# Altium PCB MC60_PCB_V1.PcbDoc
Units mm, origin at the board's own origin, x right, y up, seen from the top; angles counter-clockwise.
Board outline 45 x 60 mm, 2 copper layers (Top Layer, Bottom Layer), stack 1.569 mm thick; 42 components, 31 nets, 163 pads, 129 vias.
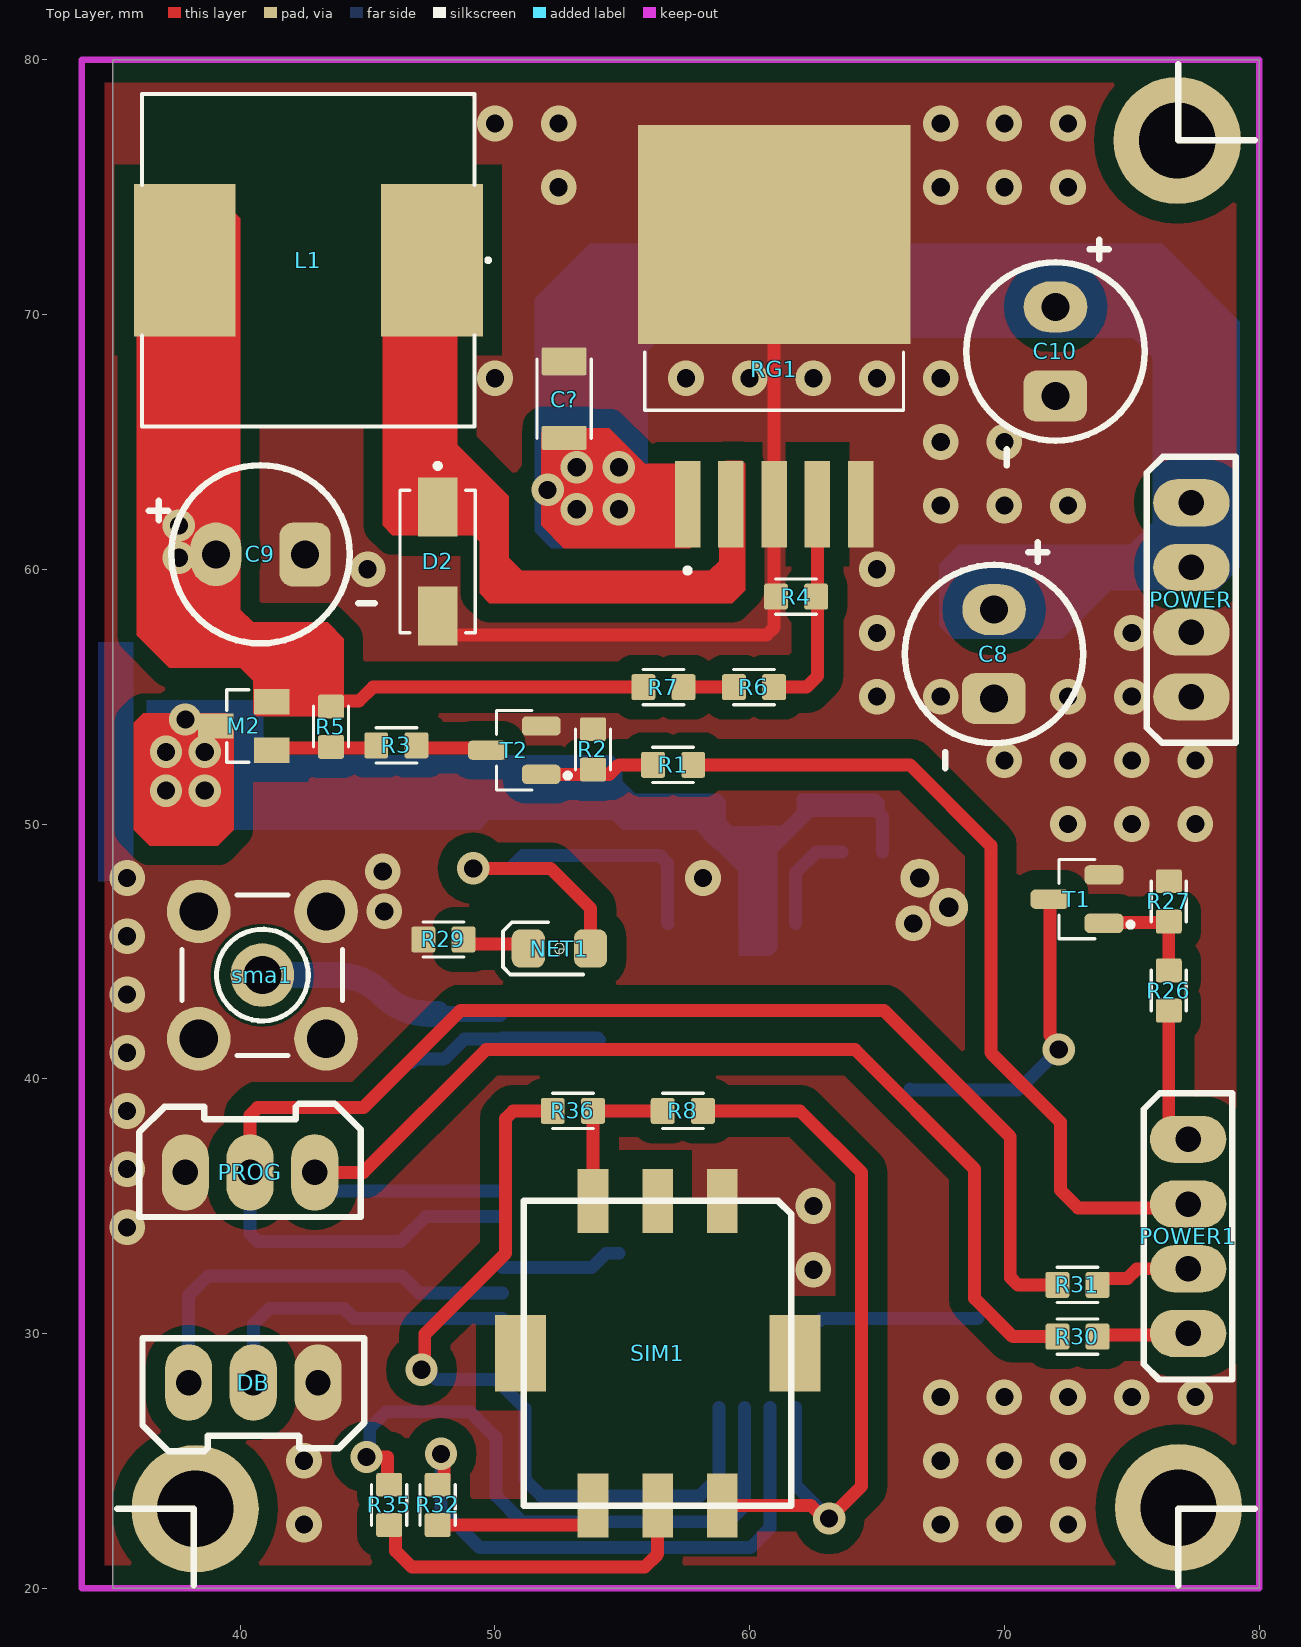
[diagram p0: Top Layer view]
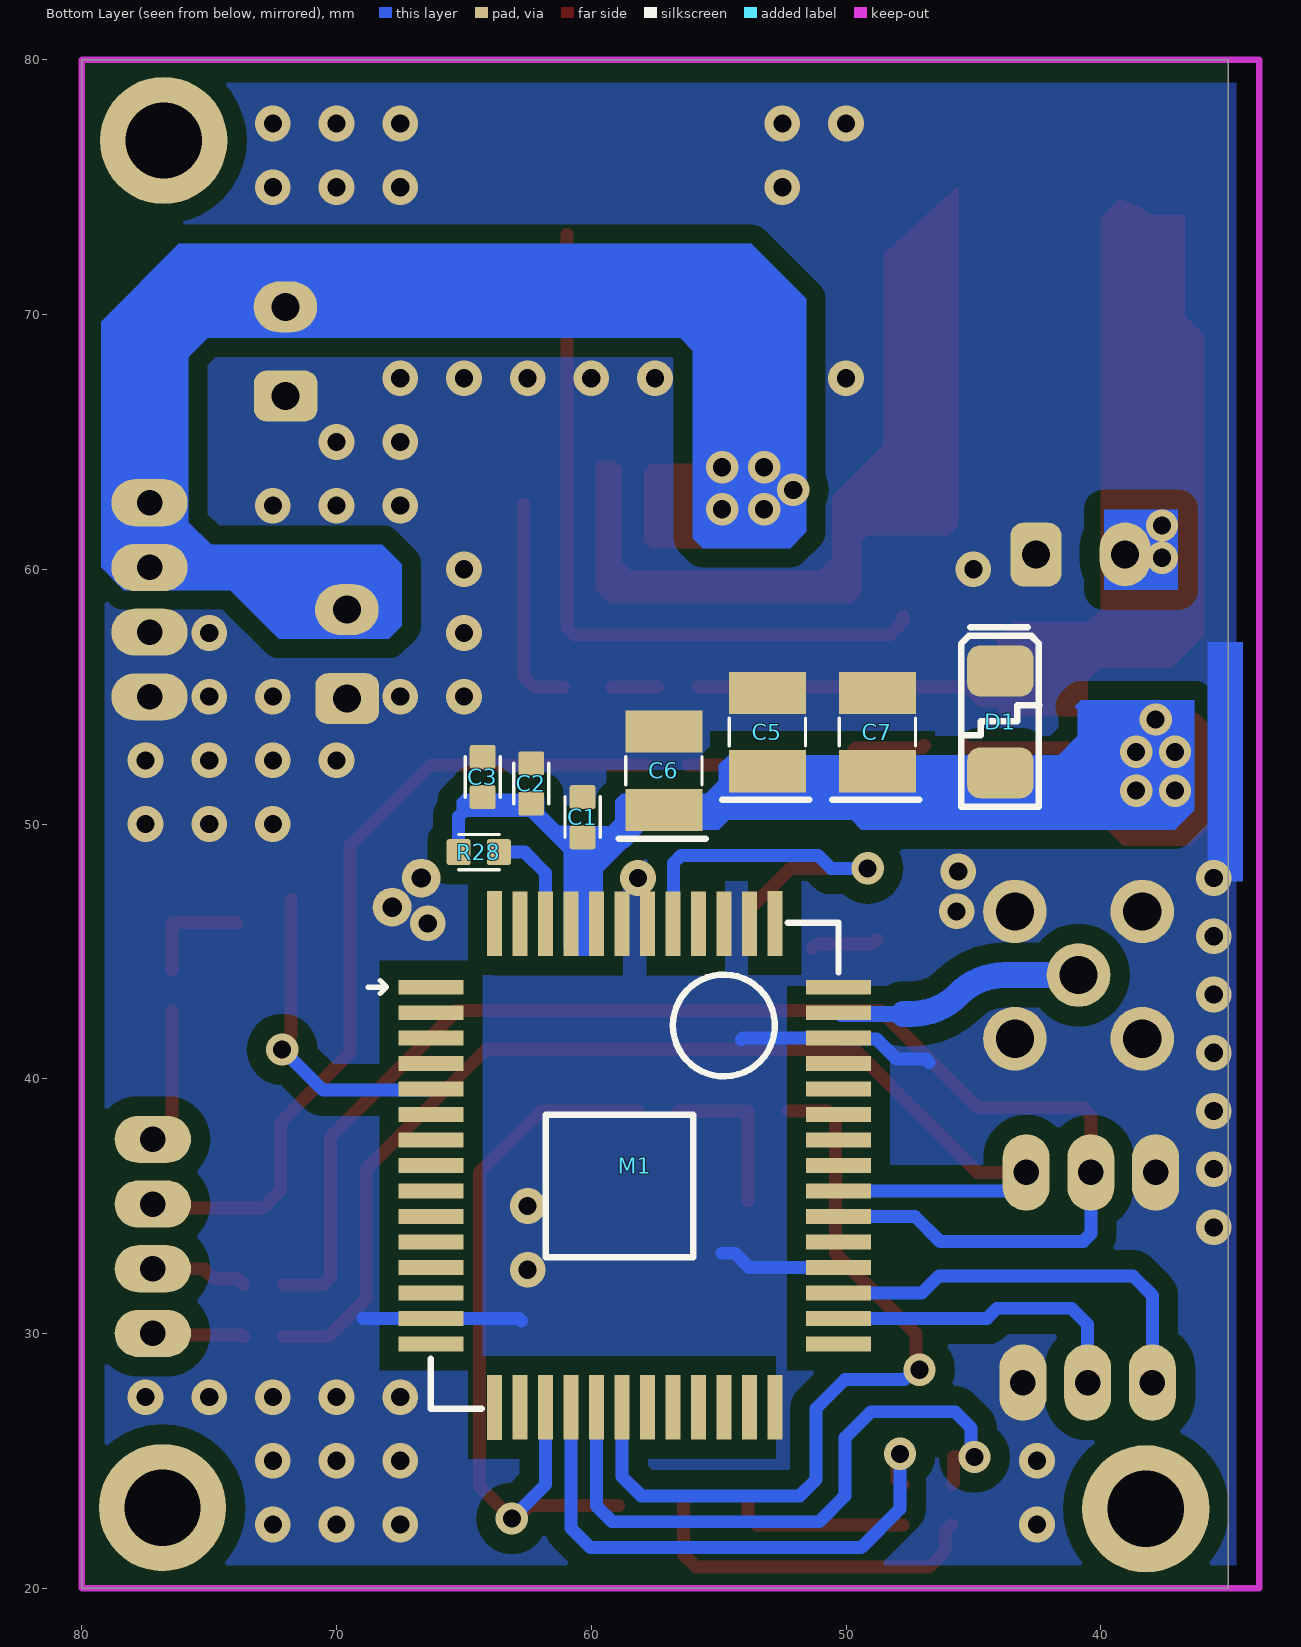
[diagram p1: Bottom Layer view, seen from below]
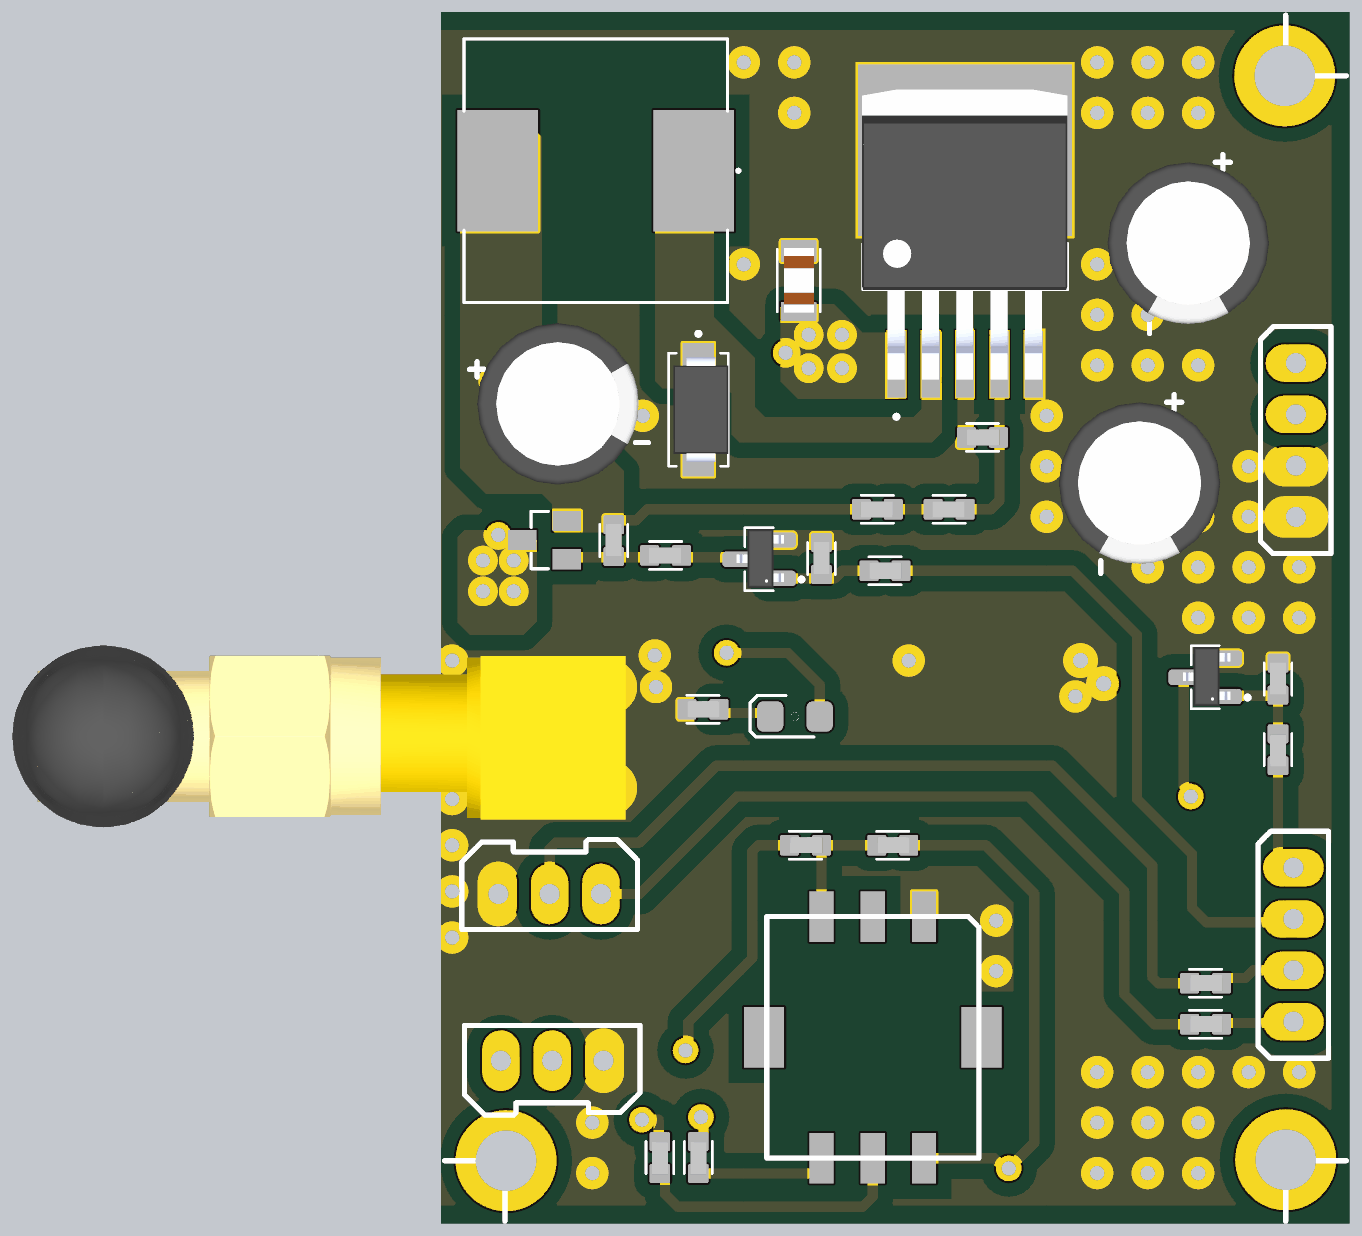
[diagram p2: 3D render of the assembled board from above, using the file's embedded part models]
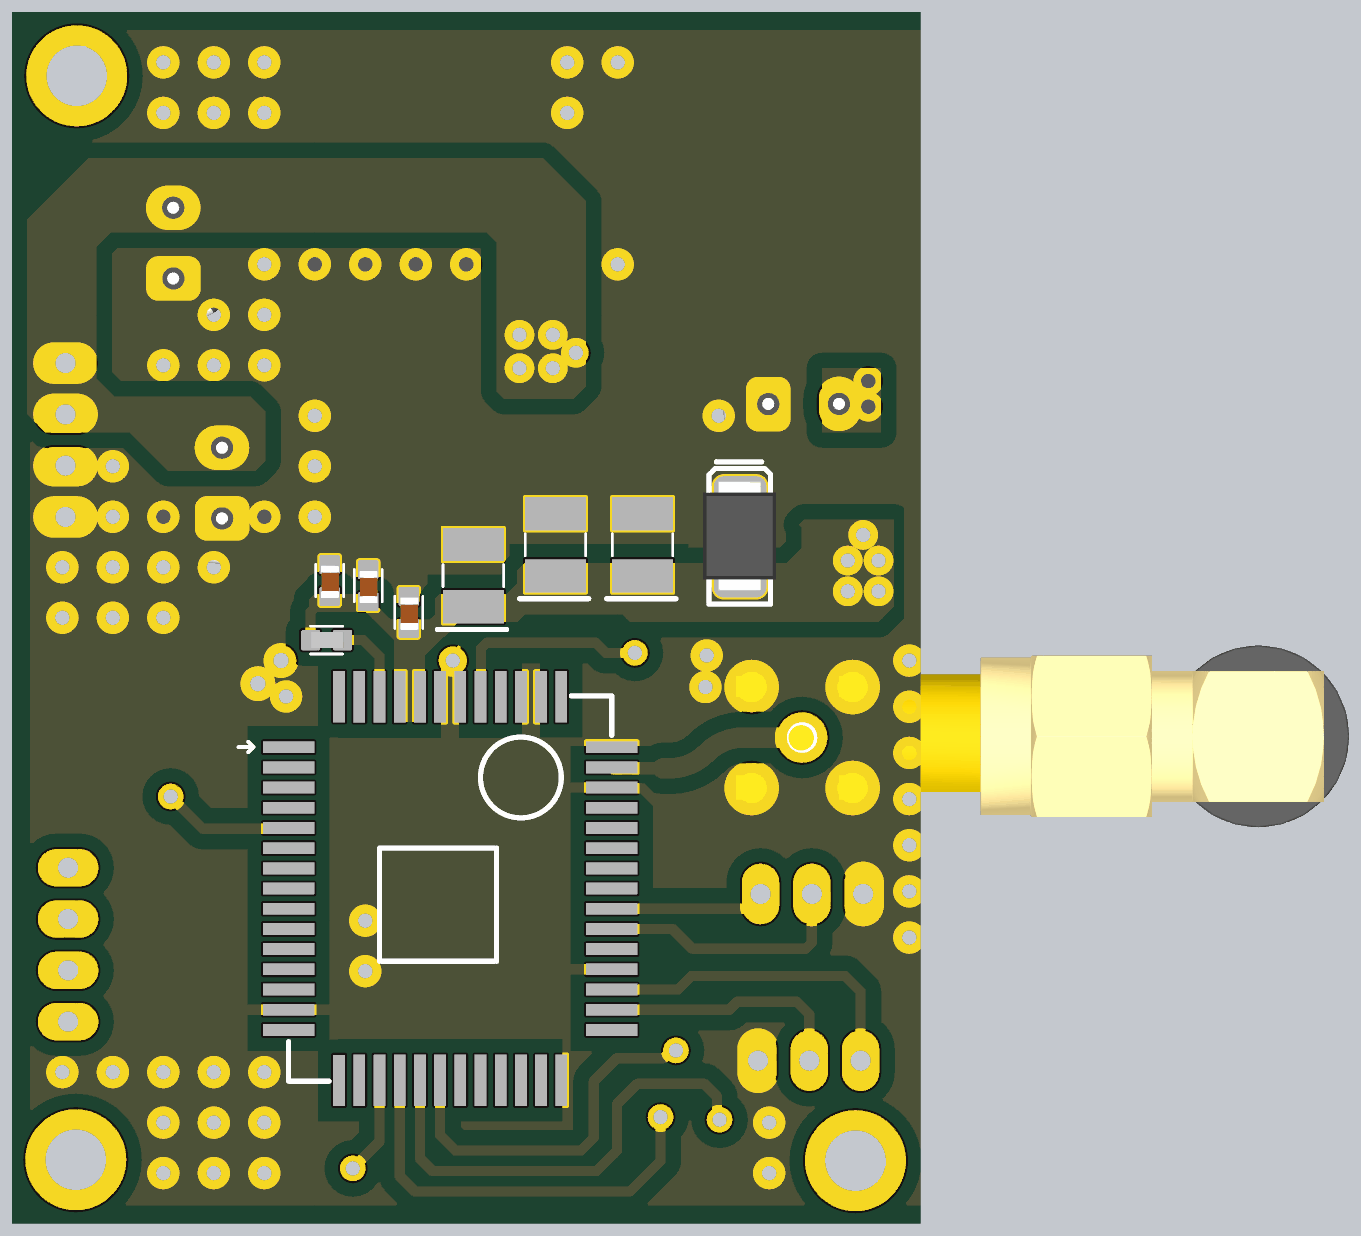
[diagram p3: 3D render of the assembled board from below, using the file's embedded part models]

## Layer stack, top to bottom
Top Solder: solder mask 0.0254, SM-001, Dk 4
Top Layer: signal copper 0.035
Dielectric 1: core 1.4986, Core-043, Dk 4.3
Bottom Layer: signal copper 0.035
Bottom Solder: solder mask 0.0254, SM-001, Dk 4

## Board outline
35,20 35,80 80,80 80,20

## Design rules (kind name [scope] priority, off if disabled: settings)
Clearance Clearance_1 [InPolygon] p1: gap=0.762 ignorepadtopadclearanceinfootprint=FALSE
Clearance [All] p2: gap=0.178 ignorepadtopadclearanceinfootprint=FALSE
Height [All] p1: minheight=0 maxheight=254 prefheight=12.7
PolygonConnect [All] p1: connectstyle=Direct reliefconductorwidth=0.254 reliefentries=4 polygonreliefangle="90 Angle" airgapwidth=0.254
RoutingVias [All] p1: holewidth=0.711 width=1.27 viastyle="Through Hole" minholewidth=0.711 minwidth=1.27 maxholewidth=0.711 maxwidth=1.27
SolderMaskExpansion [All] p1: expansion=0.102 istentingtop=FALSE
Width [All] p1: maxlimit=5 minlimit=0.254 preferedwidth=0.254 minimp=50.000000 maximp=50.000000 favimp=50.000000
29 further rules are at their usual default settings.

## Components (designator, comment, footprint, x,y, rotation, side; value= is the part's Value field where it differs from the comment)
C1 "10uF" CAP-0603 60.325,50.165 r270 bottom
C2 "1uF" CAP-0603 62.34,51.487 r270 bottom
C3 "100nF" CAP-0603 64.245,51.741 r270 bottom
C5 "100UF-16V B" CAP_TANTAL_B 53.086,53.61 r90 bottom
C6 "100UF-16V B" CAP_TANTAL_B 57.15,52.086 r90 bottom
C7 "100UF-16V B" CAP_TANTAL_B 48.768,53.61 r90 bottom
C8 "100uF/35v" CAP-EL-P3.5MM 69.596,54.92 r90 top
C9 "1000uF/10v" CAP-EL-P3.5MM 42.545,60.589 r180 top
C10 "100uF/35v" CAP-EL-P3.5MM 72.009,66.802 r90 top
C? "10uF" CAP-1206 52.578,66.675 r270 top
D1 "5V" TVS-5V-SMD 43.942,52.007 r90 bottom
D2 "ss34" DIOD/1N4007/SMD 47.752,62.465 r270 top
DB "XH3" XH3 43.029,28.043 r180 top
L1 "100uH" 100UH-101M 42.672,72.136 r180 top
M1 "mc60" MC60 66.294,43.591 r0 bottom
M2 "AO340" AO3401A 40.259,53.975 r90 top
NET1 "G" LED/0805 51.308,45.112 r0 top
POWER "" CONECTOR/XH/4PIN 77.343,54.991 r90 top
POWER1 "" CONECTOR/XH/4PIN 77.216,30 r90 top
PROG "XH3" XH3 37.87,36.346 r0 top
R1 "100R" RES/0603 56.896,52.324 r180 top
R2 "100K" RES/0603 53.848,52.832 r270 top
R3 "100R" RES/0603 46.228,53.086 r0 top
R4 "1K" RES/0603 61.722,58.928 r180 top
R5 "100K" RES/0603 43.561,53.721 r270 top
R6 "2.2K" RES/0603 60.269,55.372 r0 top
R7 "220R" RES/0603 56.713,55.372 r0 top
R8 "10K" RES/0603 57.277,38.735 r180 top
R26 "100R" RES/0603 76.454,43.561 r90 top
R27 "10K" RES/0603 76.454,46.863 r270 top
R28 "1K" RES/0603 64.516,48.895 r0 bottom
R29 "1.5K" RES/0603 47.879,45.466 r180 top
R30 "10R" RES/0603 72.771,29.873 r180 top
R31 "10R" RES/0603 72.771,31.905 r180 top
R32 "22R" RES/0603 47.752,23.368 r90 top
R35 "22R" RES/0603 45.847,23.368 r90 top
R36 "22R" RES/0603 52.959,38.735 r180 top
RG1 "lm2576" lm2576 62.103,68.834 r90 top
SIM1 "sim_card_nano" sim_card_nano 56.388,23.241 r0 top
sma1 "SMA" SMA 40.894,44.069 r180 top
T1 "7002" SOT23 73.914,46.101 r0 top
T2 "7002" SOT23 51.822,51.948 r0 top

## Footprints (in the part's own frame and the unit in brackets; to place one, negate y for a bottom-side part, rotate by r counter-clockwise, add the part's x,y. Pads: shape width x height; smd on the part's side, far side on the other; paste and mask are expansions set on the pad)
100UH-101M [mm]
  rect 4x6 smd: 1(-4.851,0) 2(4.851,0)
  silkscreen extent -7.14,-6.53 6.53,6.53
AO3401A [mm]
  rect 1x1.4 smd: D(-0.127,1.227) G(-1.077,-0.973) S(0.823,-0.973)
  silkscreen extent -1.55,-0.06 1.3,0.79
CAP-0603 [mm]
  rrect20% 0.94x1.02 smd: 1(-0.893,-0.017) 2(0.687,-0.017)
  silkscreen extent -0.9,-0.71 0.7,0.67, body extent -0.84,-0.44 0.76,0.46, height 0.77
CAP-1206 [mm]
  rrect14% 1.09x1.77 smd: 1(-1.488,0.139)
  rrect14% 0.94x1.77 smd: 2(1.517,0.139)
  silkscreen extent -1.57,-0.93 1.53,1.2, body extent -1.63,-0.6 1.57,0.9, height 1.6
CAP-EL-P3.5MM [mm]
  oval 2x2.5 hole 1.1: +(3.5,0)
  rrect50% 2x2.5 hole 1.1: -(0,0.01)
  silkscreen extent -2.73,-3.5 6.13,3.5, body extent -2.25,-4 5.75,4, height 11.5
CAP_TANTAL_B [mm]
  rect 1.651x3.02 smd: +(-1.54,0) -(1.54,0)
  silkscreen extent -2.67,-1.65 0.55,1.78
CONECTOR/XH/4PIN [mm]
  oval 1.85x3 hole 1: 1(0,0) 2(2.54,0) 3(5.08,0) 4(7.62,0)
  silkscreen extent -1.81,-1.73 9.43,1.75
DIOD/1N4007/SMD [mm]
  rect 2.33x1.56 smd: A(4.299,0) K(0.019,0)
  silkscreen extent -1.7,-1.48 4.96,1.48, body extent -0.44,-1.24 4.76,1.49, height 2.6
LED/0805 [mm]
  rrect50% 1.3x1.5 smd: A(2.45,0) K(0,0)
  silkscreen extent -0.99,-1.02 2.16,1.03
lm2576 [mm]
  rect 3.4x1 smd paste-3 mask+0: 1(-6.282,4.543) 2(-6.282,2.843) 3(-6.282,1.143) 4(-6.282,-0.557) 5(-6.282,-2.257)
  rect 8.6x10.7 smd paste-6 mask+0: 6(4.318,1.143)
  silkscreen extent -8.98,-3.94 -0.3,6.22, body extent -7.04,-3.92 7.31,6.24, height 4.65
MC60 [mm]
  rect 2.54x0.584 smd: 1(0,0) 2(0,1) 3(0,2) 4(0,3) 5(0,4) 6(0,5) 7(0,6) 8(0,7) 9(0,8) 10(0,9) 11(0,10) 12(0,11) 13(0,12) 14(0,13) 15(0,14) 28(-16,14) 29(-16,13) 30(-16,12) 31(-16,11) 32(-16,10) 33(-16,9) 34(-16,8) 35(-16,7) 36(-16,6) 37(-16,5) 38(-16,4) 39(-16,3) 40(-16,2) 41(-16,1) 42(-16,0)
  rect 0.584x2.54 smd: 16(-2.5,16.5) 17(-3.5,16.492) 18(-4.5,16.492) 19(-5.5,16.492) 20(-6.5,16.492) 21(-7.5,16.492) 22(-8.5,16.492) 23(-9.5,16.492) 24(-10.5,16.492) 25(-11.5,16.492) 26(-12.5,16.492) 27(-13.5,16.492) 43(-13.5,-2.5) 44(-12.5,-2.492) 45(-11.5,-2.492) 46(-10.5,-2.492) 47(-9.5,-2.492) 48(-8.5,-2.492) 49(-7.5,-2.492) 50(-6.5,-2.492) 51(-5.5,-2.492) 52(-4.5,-2.492) 53(-3.5,-2.492) 54(-2.5,-2.5)
  silkscreen extent -16,-2.54 2.48,16.54
RES/0603 [mm]
  rrect20% 0.94x1.02 smd: 1(-0.889,0) 2(0.691,0)
  silkscreen extent -0.9,-0.69 0.7,0.69, body extent -0.93,-0.41 0.67,0.39, height 0.43
sim_card_nano [mm]
  rect 1.2x2.5 smd: 1(2.54,0) 2(0,0) 3(-2.54,0) 5(2.54,11.96) 6(0,11.96) 7(-2.54,11.96)
  rect 2x3 smd: 4(-5.385,5.98) 4(5.385,5.98)
  silkscreen extent -5.25,0 5.25,11.96
SMA [mm]
  round 2.5 hole 1.5: 1(0.025,0) GND(-2.475,2.5) GND(-2.475,-2.5) GND(2.525,2.5) GND(2.525,-2.5)
  silkscreen extent -3.12,-3.15 3.18,3.15, body extent -3.25,-4.56 27.11,4.44, height 49.75
SOT23 [mil]
  rrect50% 60x30 smd: 1(-0.24,0) 2(-83.7,37.4) 3(-0.24,74.8)
  silkscreen extent -70,-24 45,99, body extent -86,-19 7,96, height 44
TVS-5V-SMD [mm]
  rrect50% 2x2.6 smd: 1(4,0) 2(0,0)
  silkscreen extent -1.33,-1.53 5.72,1.54, body extent -0.66,-1.79 4.74,1.83, height 2.43
XH3 [mm]
  oval 1.85x3 hole 1: 1(-0.024,-0.024) 2(2.516,-0.024) 3(5.056,-0.024)
  silkscreen extent -1.83,-1.78 6.87,2.67

## Part data
C1 C2 C3 C?: library part cap_smd
C5 C6 C7 C8 C9 C10: library part cap-electrolit
D1: library part TVS-SMD
D2: library part DIOD/RECTIFIERS
L1: library part inductor
M2: library part MOSFET_P_CH
NET1: library part LED
POWER POWER1: library part CONECTOR/XH/4PIN
R1 R2 R3 R4 R5 R6 R7 R8 R26 R27 R28 R29 R30 R31 R32 R35 R36: library part RES/SMD
T1 T2: library part NPN

## Free pads (board coordinates)
  round 5 hole 3: 11(38.227,23.114) 11(76.787,76.835) 11(76.835,23.162)
  round 1.524 hole 0.762: 13(66.675,47.879) 13(67.818,46.736)

## Via types
v1: diameter 1.4, hole 0.711, Top Layer to Bottom Layer, 111 vias
v2: diameter 1.27, hole 0.711, Top Layer to Bottom Layer, 18 vias

## Nets (pads, with @x,y where several pads share a name; then routed paths per layer and width w, separated by ;. In a path a pad name is that pad's centre, name@x,y a point inside that pad or via, vN(x,y) a via of type N, cw(c..) or ccw(c..) an arc to the next point about the centre after c; other vN are vias at no path point)
4V3: C1.2 C2.2 C3.2 C5.+ C6.+ C7.+ D1.2 M1.50 M1.51 M2.D R28.2 | length 39.1
  Top Layer w0.508: v2(38.608,51.308) 38.754,51.454 38.754,53.602 39,53.848 M2.D
  Bottom Layer w0.508: v2(38.608,51.308) 38.814,51.308 39.513,52.007 D1.2 48.768,52.007 C5.+@52.641,52.007 ; C5.+ 53.657,51.498 54.546,51.498 55.176,50.869 56.827,50.869 C6.+ 57.834,50.546 58.406,49.974 58.406,49.574 58.689,49.29 C1.2@60.114,49.29 ; M1.50 59.794,48.97 C1.2@60.114,49.29 ; C1.2@60.598,49.222 60.794,49.026 M1.51 ; C2.2@62.101,50.584 62.101,50.417 61.378,49.694 60.558,49.694 60.154,49.29 C1.2@60.114,49.29 ; C2.2 64.699,50.8 65.207,50.292 R28.2
  other v2: 37.084,51.308 37.084,52.832 38.608,52.832 37.846,54.102
+24: C8.+ C10.+ C?.2 POWER.3 POWER.4 RG1.1 | length 59.3
  Top Layer w0.762: C?.2 53.027,65.158 53.116,65.069 53.116,62.2 v2@53.213,62.103 ; 53.213,61.684 57.441,61.684 RG1.1@57.441,62.552
  Bottom Layer w0.762: v2@53.213,62.103 53.086,62.23 53.086,69.856 53.532,70.302 C10.+ 76.129,70.302 77.343,69.088 POWER.4 POWER.3 70.296,60.071 69.85,59.625 69.85,58.674 C8.+
  other v2: 53.213,62.357 54.864,62.357 52.07,63.119 53.213,64.008 54.864,64.008
GND: C1.1 C2.1 C3.1 C5.- C6.- C7.- C8.- C9.- C10.- C?.1 D1.1 D2.A DB.1 M1.14 M1.27 M1.31 M1.40 M1.42 M1.44 M1.45 M1.48 M1.49 pad.13 POWER.1 POWER.2 PROG.1 R2.1 R4.2 R27.1 R29.2 RG1.3 RG1.5 RG1.6 SIM1.5 sma1.GND T1.3 T2.3 | length 48.1
  Top Layer w0.508: D2.A 47.752,57.946 48.278,57.42 60.662,57.42 60.96,57.718 RG1.3 RG1.6
  Bottom Layer w0.508: 46.736,40.64 46.863,40.767 48.006,40.767 48.792,41.553 50.256,41.553 M1.40 54.04,41.591 54.102,41.529 ; M1.31 53.8,32.591 54.356,33.147 54.864,33.147 ; 62.738,30.48 62.849,30.591 M1.14 68.945,30.591 68.961,30.607
  other v1: 42.5,22.5 42.5,22.5 67.5,22.5 67.5,22.5 70,22.5 70,22.5 72.5,22.5 72.5,22.5 42.5,25 42.5,25 67.5,25 67.5,25 70,25 70,25 72.5,25 72.5,25 67.5,27.5 67.5,27.5 70,27.5 70,27.5 72.5,27.5 72.5,27.5 75,27.5 75,27.5 77.5,27.5 77.5,27.5 62.5,32.5 62.5,32.5 35.56,34.163 62.5,35 62.5,35 35.56,36.449 35.56,38.735 35.56,41.021 35.56,43.307 35.56,45.593 66.421,46.101 45.655,46.569 35.56,47.879 58.166,47.879 45.593,48.133 72.5,50 72.5,50 75,50 75,50 77.5,50 77.5,50 70,52.5 70,52.5 72.5,52.5 72.5,52.5 75,52.5 75,52.5 77.5,52.5 77.5,52.5 65,55 65,55 67.5,55 67.5,55 72.5,55 72.5,55 75,55 75,55 65,57.5 65,57.5 75,57.5 75,57.5 45,60 45,60 65,60 65,60 67.5,62.5 67.5,62.5 70,62.5 70,62.5 72.5,62.5 72.5,62.5 67.5,65 67.5,65 70,65 70,65 50,67.5 50,67.5 57.5,67.5 57.5,67.5 60,67.5 60,67.5 62.5,67.5 62.5,67.5 65,67.5 65,67.5 67.5,67.5 67.5,67.5 52.5,75 52.5,75 67.5,75 67.5,75 70,75 70,75 72.5,75 72.5,75 50,77.5 50,77.5 52.5,77.5 52.5,77.5 67.5,77.5 67.5,77.5 70,77.5 70,77.5 72.5,77.5 72.5,77.5
GSM_EN: POWER1.3 R1.1 | length 33
  Top Layer w0.508: R1.1 66.294,52.324 69.469,49.149 69.469,41.021 72.2,38.291 72.2,35.623 72.898,34.925 77.061,34.925 POWER1.3
NetC9_+: C9.+ L1.2 M2.S R5.1 R7.1 | length 33.7
  Top Layer w0.508: R5.1 43.777,54.826 44.666,54.826 45.212,55.372 R7.1
  Top Layer w0.762: L1.2 39.045,70.912 39.045,58.237 41.232,56.05 M2.S 43.333,54.798 43.521,54.61 R5.1
  other v2: 37.592,60.452 37.592,61.722
NetD2_K: D2.K L1.1 RG1.2 | length 26.9
  Top Layer w0.762: L1.1 47.752,71.907 D2.K 48.095,62.103 49.592,62.103 50.038,61.657 50.038,59.628 50.484,59.182 58.814,59.182 59.26,59.628 RG1.2
NetDB_2: DB.2 M1.29 | length 12.5
  Bottom Layer w0.508: DB.2 40.513,30.353 41.148,30.988 44.069,30.988 44.466,30.591 M1.29
NetDB_3: DB.3 M1.30 | length 16.3
  Bottom Layer w0.508: DB.3 37.973,31.496 38.735,32.258 46.355,32.258 47.022,31.591 M1.30
NetM1_5: M1.5 T1.2 | length 12.6
  Top Layer w0.508: T1.2 71.788,41.702 72.136,41.354 v2(72.136,41.148)
  Bottom Layer w0.508: M1.5 66.332,39.553 70.541,39.553 v2(72.136,41.148)
NetM1_19: M1.19 R32.2 | length 21.8
  Top Layer w0.508: R32.2 47.792,24.059 48.008,24.275 v2@48.008,24.942
  Bottom Layer w0.508: v2(47.879,25.273) 47.879,23.114 49.403,21.59 60.032,21.59 60.794,22.352 M1.19
NetM1_20: M1.20 R35.2 | length 25.4
  Top Layer w0.508: v2(44.958,25.146) 45.783,25.146 45.783,24.123 R35.2
  Bottom Layer w0.508: v2(44.958,25.146) 45.085,25.273 45.085,26.289 45.72,26.924 49.022,26.924 50.038,25.908 50.038,23.622 51.054,22.606 59.182,22.606 59.794,23.218 M1.20
NetM1_21: M1.21 R36.2 | length 31.6
  Top Layer w0.508: v2(47.117,28.575) 47.244,28.702 47.244,29.972 50.419,33.147 50.419,38.437 50.717,38.735 R36.2
  Bottom Layer w0.508: v2(47.117,28.575) 47.323,28.575 47.704,28.194 50.038,28.194 51.181,27.051 51.181,24.257 51.816,23.622 58.039,23.622 58.794,24.377 M1.21
NetM1_33: M1.33 PROG.2 R31.2 | length 56.2
  Top Layer w0.508: PROG.2 40.386,38.564 40.684,38.862 44.831,38.862 48.641,42.672 65.278,42.672 70.231,37.719 70.231,32.203 70.529,31.905 R31.2
  Bottom Layer w0.508: PROG.2 40.386,33.913 40.684,33.615 46.315,33.615 47.291,34.591 M1.33
NetM1_34: M1.34 PROG.3 R30.2 | length 46.5
  Top Layer w0.508: PROG.3 44.831,36.322 49.657,41.148 64.135,41.148 68.834,36.449 68.834,31.369 70.33,29.873 R30.2
  Bottom Layer w0.508: PROG.3 42.926,36.211 43.546,35.591 M1.34
NetM1_41: M1.41 sma1.1 | length 9.9
  Bottom Layer w0.508: M1.41@50.183,42.545 ccw(c50.183,42.702) M1.41
  Bottom Layer w0.635: 47.752,42.545 M1.41@50.183,42.545
  Bottom Layer w1.016: sma1.1 43.779,44.069 cw(c43.779,41.529) 45.575,43.325 45.611,43.289 ccw(c47.407,45.085) 47.407,42.545 47.752,42.545
NetM1_47: M1.47 NET1.A | length 17.2
  Top Layer w0.508: v2(49.149,48.26) 52.179,48.26 53.758,46.681 NET1.A
  Bottom Layer w0.508: v2(49.149,48.26) 50.59,48.26 51.098,48.768 56.471,48.768 56.769,48.47 56.769,46.108 M1.47
NetM1_52: M1.52 R28.1 | length 4.2
  Bottom Layer w0.508: M1.52 61.794,48.078 62.611,48.895 R28.1
NetM2_G: M2.G R3.1 R5.2 | length 4.2
  Top Layer w0.508: M2.G 41.326,52.992 45.245,52.992 R3.1
NetNET1_K: NET1.K R29.1 | length 2.7
  Top Layer w0.508: R29.1 48.945,45.289 51.131,45.289 NET1.K
NetPOWER1_1: POWER1.1 R30.1 | length 3.6
  Top Layer w0.508: R30.1 73.724,29.937 77.153,29.937 POWER1.1
NetPOWER1_2: POWER1.2 R31.1 | length 3.8
  Top Layer w0.508: R31.1 73.66,31.945 73.876,32.161 74.833,32.161 75.212,32.54 POWER1.2
NetR1_2: R1.2 R2.2 T2.1 | length 4.5
  Top Layer w0.508: T2.1 54.488,51.948 54.864,52.324 R1.2
NetR3_2: R3.2 T2.2 | length 2.9
  Top Layer w0.508: R3.2 47.013,52.992 49.602,52.992 T2.2
NetR4_1: R4.1 R6.2 RG1.4 | length 8.5
  Top Layer w0.508: R6.2@61.087,55.372 62.23,55.372 62.66,55.802 RG1.4 RG1.4@62.639,62.531
NetR6_1: R6.1 R7.2 | length 1.8
  Top Layer w0.508: R7.2 R6.1@59.182,55.372
NetR26_2: R26.2 R27.2 T1.1 | length 4.4
  Top Layer w0.508: T1.1 73.943,46.136 76.419,46.136 76.454,46.101 R26.2
PWR: POWER1.4 R26.1 | length 5.5
  Top Layer w0.508: R26.1 76.454,38.24 77.074,37.62 POWER1.4
SIM_CLK: R32.1 SIM1.3 | length 6.7
  Top Layer w0.508: R32.1 53.502,22.479 53.848,22.825 SIM1.3
SIM_DATA: R8.2 R36.1 SIM1.7 | length 6.3
  Top Layer w0.508: SIM1.7 R36.1 R8.2
SIM_RST: R35.1 SIM1.2 | length 13.8
  Top Layer w0.508: R35.1 45.887,22.479 46.103,22.263 46.103,21.461 46.736,20.828 55.88,20.828 56.388,21.336 SIM1.2
SIM_VDD: M1.18 R8.1 SIM1.1 | length 30.7
  Top Layer w0.508: R8.1 61.976,38.735 64.389,36.322 64.389,24.003 v2(63.119,22.733) 62.913,22.733 62.405,23.241 SIM1.1
  Bottom Layer w0.508: M1.18 61.794,24.058 v2(63.119,22.733)
pads on no net: M1.1 M1.2 M1.3 M1.4 M1.6 M1.7 M1.8 M1.9 M1.10 M1.11 M1.12 M1.13 M1.15 M1.16 M1.17 M1.22 M1.23 M1.24 M1.25 M1.26 M1.28 M1.32 M1.35 M1.36 M1.37 M1.38 M1.39 M1.43 M1.46 M1.53 M1.54 SIM1.4 SIM1.6

## Polygon pours and split planes (outlines as drawn)
GND on Top Layer "GND_L01_P001" (solid, remove dead copper, pour order 1): 33.782,20 33.782,80 80,80 80,20
no net on Top Layer "NONET_L01_P000" (solid, pour order 0): 35,20
GND on Bottom Layer "GND_L02_P002" (solid, remove dead copper, pour order 2): 33.782,19.939 33.782,79.939 79.925,79.939 79.925,19.939

## Keep-outs
Keep-Out Layer:
  lines w0.254: 33.782,20 80,20 80,80 33.782,80 33.782,20

## Other copper
Top Layer:
  region net +24: 51.943,65.532 54.483,65.532 55.88,64.135 57.658,64.135 57.912,63.881 57.912,61.087 57.658,60.833 52.705,60.833 51.816,61.722 51.816,65.405
  pour cut-out: 36.195,78.613 49.022,78.613 49.149,78.486 49.149,67.183 47.625,65.659 37.084,65.659 36.195,66.548
  pour cut-out: 51.181,23.241 51.181,35.179 61.087,35.179 61.595,34.671 61.595,23.241
  region net 4V3: 39.497,54.356 36.195,54.356 35.814,53.975 35.814,49.784 36.449,49.149 39.116,49.149 39.751,49.784 39.751,53.848 39.497,54.102
  region net NetC9_+: 38.354,74.168 38.1,73.914 36.703,73.914 36.703,69.977 35.941,69.215 35.941,57.404 37.211,56.134 40.005,56.134 40.513,55.626 40.513,54.356 40.64,54.229 43.815,54.229 44.069,54.483 44.069,57.277 43.434,57.912 40.513,57.912 40.005,58.42 40.005,73.787 39.243,74.549
  region: 35.687,74.041
  region net NetD2_K: 45.593,75.057 45.593,61.722 45.974,61.341 49.149,61.341 49.403,61.087 49.403,59.055 49.784,58.674 59.309,58.674 59.817,59.182 59.817,64.135 59.69,64.262 59.055,64.262 58.801,64.008 58.801,60.325 58.42,59.944 51.054,59.944 50.546,60.452 50.546,62.865 48.514,64.897 48.514,72.39 48.387,72.517
Bottom Layer:
  rectangle net NetC9_+: 36.957,59.182 39.878,62.357
  rectangle net GND: 34.417,47.752 35.814,57.15
  region net 4V3: 36.322,54.864 40.767,54.864 41.021,54.61 40.894,54.483 40.894,53.467 41.656,52.705 54.61,52.705 54.991,52.324 54.991,51.689 55.499,51.181 58.801,51.181 59.055,50.927 59.055,50.165 59.309,49.911 61.341,49.911 61.849,50.419 61.849,51.054 61.976,51.181 65.024,51.181 65.278,50.927 65.278,50.363 65.207,50.292 62.484,50.292 61.087,48.895 61.087,45.085 60.833,44.831 59.563,44.831 59.563,48.133 57.912,49.784 54.991,49.784 54.61,50.165 49.784,50.165 49.403,49.784 37.084,49.784 36.322,50.546
  region net +24: 55.626,60.833 56.007,61.214 56.007,68.58 56.515,69.088 75.057,69.088 75.819,68.326 75.819,61.849 74.93,60.96 68.199,60.96 67.437,60.198 67.437,57.785 67.945,57.277 72.263,57.277 74.168,59.182 78.359,59.182 79.248,60.071 79.248,69.723 76.2,72.771 53.721,72.771 51.562,70.612 51.562,61.468 52.197,60.833

## Silkscreen, mask and mechanical layers (free items; w line width, h text height)
Top Overlay:
  lines w0.254: 35.179,23.114 38.179,23.114 38.179,20.114 ; 76.835,20.114 76.835,23.114 79.835,23.114 ; 76.835,79.835 76.835,76.835 79.835,76.835